# Altium PCB USBasp_下载线_标注.PCBDOC
Units mm, origin at the board's own origin, x right, y up, seen from the top; angles counter-clockwise.
Board outline 152.4 x 101.6 mm, 2 copper layers (Top Layer, Bottom Layer); 21 components, 22 nets, 84 pads, 0 vias.
Unrouted connection lines stored in the file: 49.
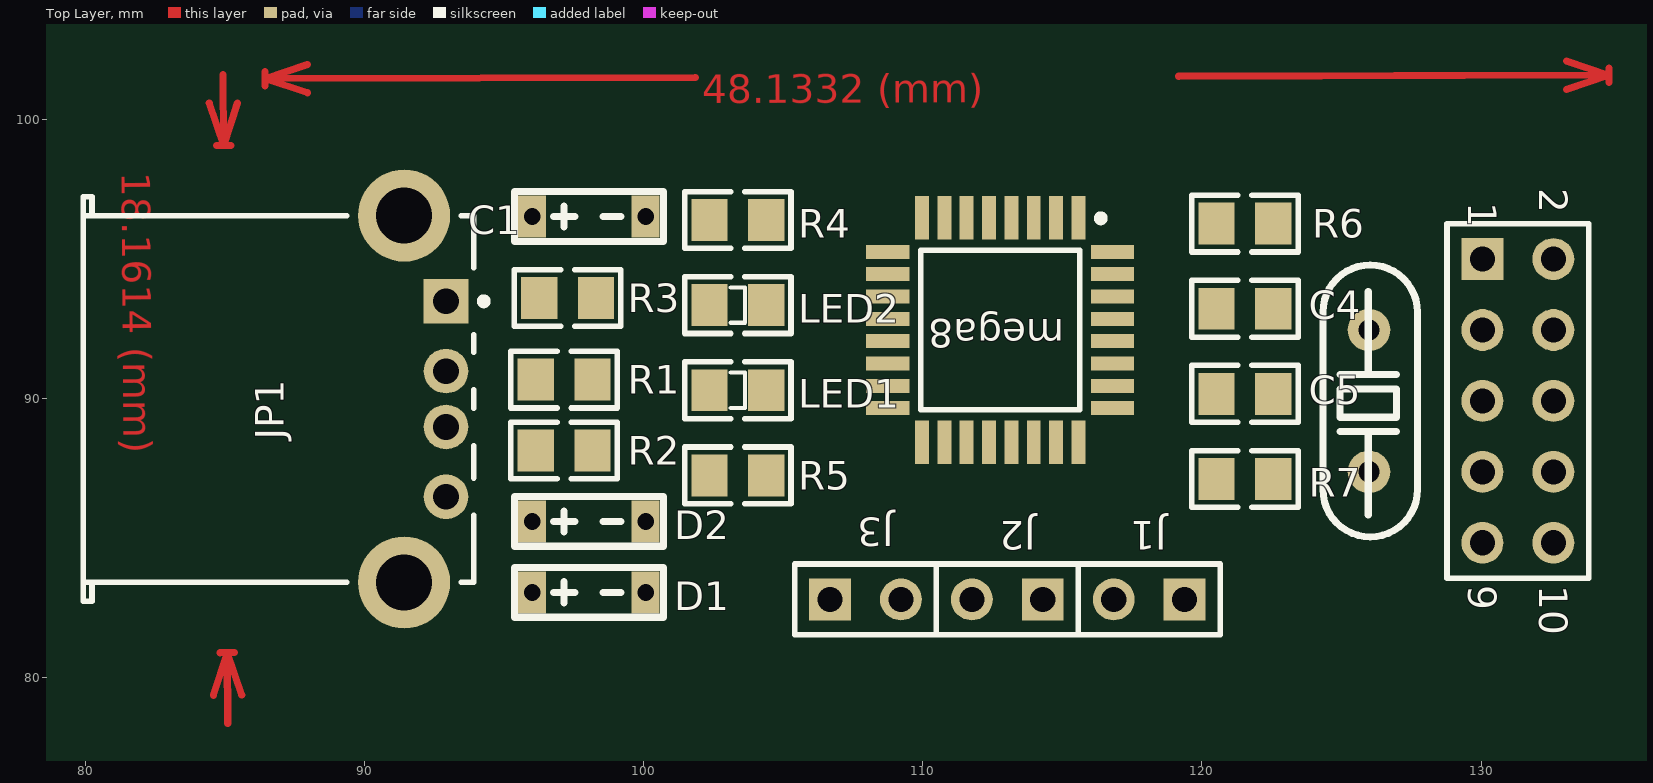
[diagram p0: Top Layer view]
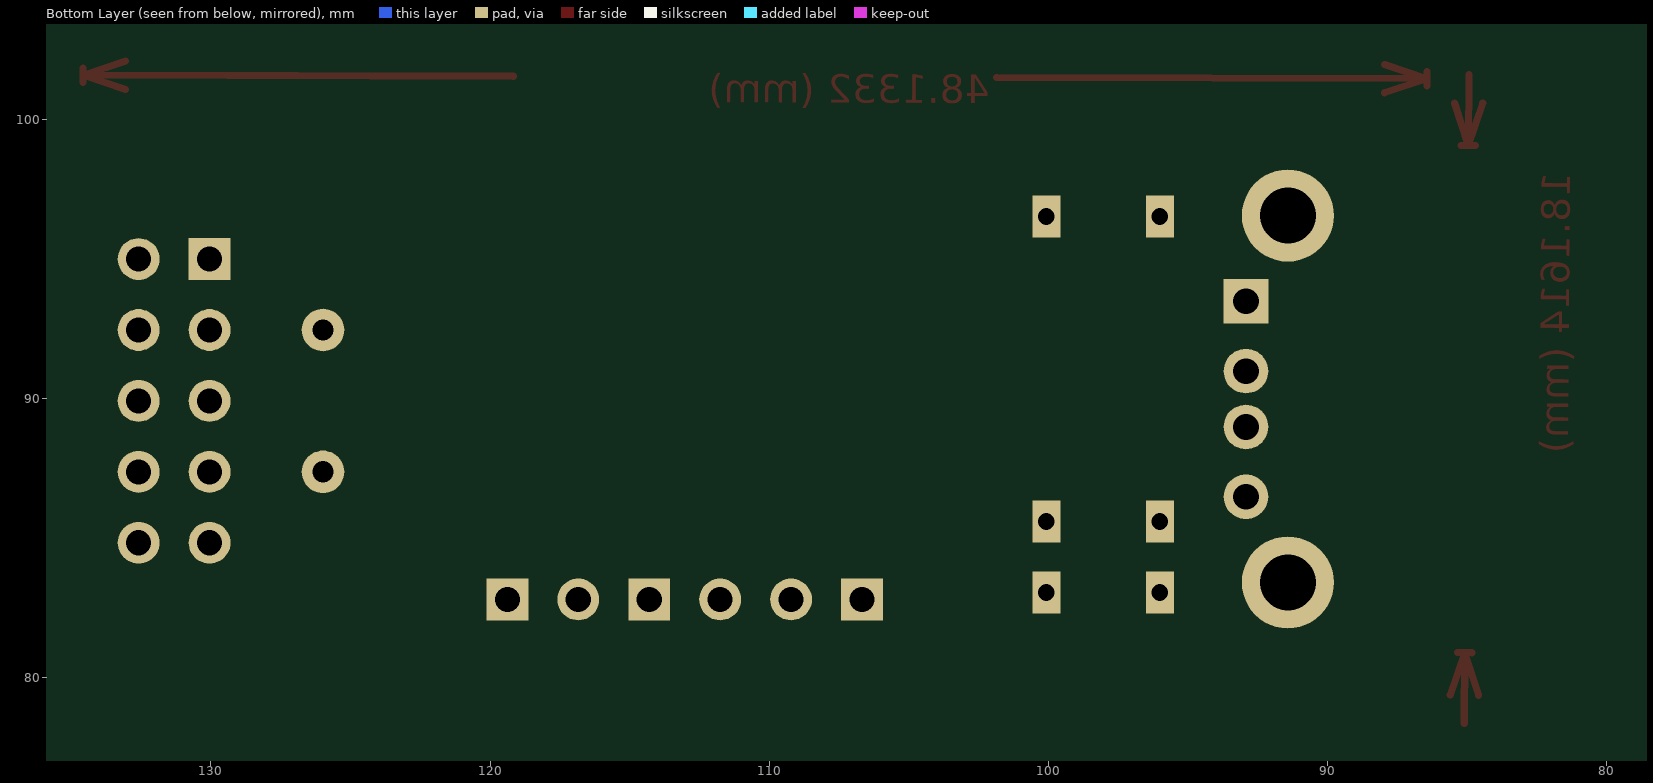
[diagram p1: Bottom Layer view, seen from below]

## Layer stack, top to bottom
Top Layer: signal copper 0.0356
Dielectric: dielectric 0.32, FR-4, Dk 4.8
Bottom Layer: signal copper 0.0356

## Board outline
25.4,25.4 177.8,25.4 177.8,127 25.4,127

## Design rules (kind name [scope] priority, off if disabled: settings)
Clearance [All] p1: gap=0.254
ComponentClearance [All] p1: gap=0.254 collisioncheckmode=3 verticalgap=0.254
PolygonConnect [All] p1: connectstyle=Relief reliefconductorwidth=0.254 reliefentries=4 polygonreliefangle="90 Angle"
RoutingVias [All] p1: holewidth=0.711 width=1.27 viastyle="Through Hole" minholewidth=0.711 minwidth=1.27 maxholewidth=0.711 maxwidth=1.27
SolderMaskExpansion [All] p1: expansion=0.102
TestPointUsage [All] p1: valid=0 allowmultiple=FALSE
Testpoint [All] p1: side=15 testpointundercomponent=TRUE minsize=1.016 maxsize=2.54 preferedsize=1.524 minholesize=0 maxholesize=1.016 preferedholesize=0.813 testpointgrid=0.025 style=1023 order=0123456789
Width [All] p1: maxlimit=0.254 minlimit=0.254 preferedwidth=0.254
17 further rules are at their usual default settings.

## Components (designator, comment, footprint, x,y, rotation, side; value= is the part's Value field where it differs from the comment)
C1 "" TPDR 100.584,96.52 r0 top
C4 "" TP-0805-R 124.079,91.948 r0 top
C5 "" TP-0805-R 124.079,88.9 r0 top
D1 "Diode 11DQ03" TPDR 100.584,83.058 r0 top
D2 "Diode 11DQ03" TPDR 100.584,85.598 r0 top
ISP "" HDR2X5 130.048,94.996 r270 top
J1 "CON2" HDR1X2 119.38,82.804 r180 top
J2 "CON2" HDR1X2 114.3,82.804 r180 top
J3 "CON2" HDR1X2 106.68,82.804 r0 top
JP1 "4 HEADER" USB-5V 90.424,86.36 r180 top
LED1 "" TP-0805-D 105.918,89.027 r0 top
LED2 "" TP-0805-D 105.918,92.075 r0 top
mega8 "贴片" QFP7x7-G32/N 112.776,92.456 r270 top
R1 "" TP-0805-R 99.695,89.408 r0 top
R2 "" TP-0805-R 94.615,89.408 r180 top
R3 "" TP-0805-R 94.742,94.869 r180 top
R4 "" TP-0805-R 105.918,95.123 r0 top
R5 "" TP-0805-R 105.918,85.979 r0 top
R6 "" TP-0805-R 118.999,97.536 r180 top
R7 "" TP-0805-R 118.999,88.392 r180 top
Y1 "XTAL" JZ_ZC 125.984,92.456 r90 top

## Footprints (in the part's own frame and the unit in brackets; to place one, negate y for a bottom-side part, rotate by r counter-clockwise, add the part's x,y. Pads: shape width x height; smd on the part's side, far side on the other; paste and mask are expansions set on the pad)
HDR1X2 [mm] "Connector; Header; 2 Position"
  rect 1.5x1.5 hole 0.9: 1(0,0)
  round 1.5 hole 0.9: 2(2.54,0)
  silkscreen extent -1.27,-1.27 3.81,1.27
HDR2X5 [mm] "Connector; Header; 5x2 Position"
  rect 1.5x1.5 hole 0.9: 1(0,0)
  round 1.5 hole 0.9: 2(0,2.54) 3(2.54,0) 4(2.54,2.54) 5(5.08,0) 6(5.08,2.54) 7(7.62,0) 8(7.62,2.54) 9(10.16,0) 10(10.16,2.54)
  silkscreen extent -1.27,-1.27 11.43,3.81
JZ_ZC [mil] "晶振"
  round 60 hole 30: 1(-200,0) 2(0,0)
  silkscreen extent -292,-68 92,65
QFP7x7-G32/N [mm] "贴片mega8"
  rect 1.55x0.5 smd: 1(-4.025,2.8) 2(-4.025,2) 3(-4.025,1.2) 4(-4.025,0.4) 5(-4.025,-0.4) 6(-4.025,-1.2) 7(-4.025,-2) 8(-4.025,-2.8) 17(4.025,-2.8) 18(4.025,-2) 19(4.025,-1.2) 20(4.025,-0.4) 21(4.025,0.4) 22(4.025,1.2) 23(4.025,2) 24(4.025,2.8)
  rect 0.5x1.55 smd: 9(-2.8,-4.025) 10(-2,-4.025) 11(-1.2,-4.025) 12(-0.4,-4.025) 13(0.4,-4.025) 14(1.2,-4.025) 15(2,-4.025) 16(2.8,-4.025) 25(2.8,4.025) 26(2,4.025) 27(1.2,4.025) 28(0.4,4.025) 29(-0.4,4.025) 30(-1.2,4.025) 31(-2,4.025) 32(-2.8,4.025)
  silkscreen extent -4.12,-2.85 2.85,3.73
TP-0805-D [mm] "贴片二极管"
  rect 1.3x1.5 smd: 1(-3.556,1.27) 2(-1.524,1.27)
  silkscreen extent -4.44,0.25 -0.64,2.29
TP-0805-R [mm] "贴片0805"
  rect 1.3x1.5 smd: 1(-3.556,1.27) 2(-1.524,1.27)
  silkscreen extent -4.44,0.25 -0.64,2.29
TPDR [mm] "贴片电容"
  rect 1x1.5 hole 0.6: 1(-4.572,0) 2(-0.508,0)
  silkscreen extent -5.21,-0.89 0.13,0.89
USB-5V [mm] "USB接口"
  rect 1.6x1.6 hole 0.92: 1(-2.503,-7.123)
  round 1.6 hole 0.92: 2(-2.503,-4.624) 3(-2.503,-2.624) 4(-2.503,-0.124)
  round 3.3 hole 2: 5(-1.002,2.947) 6(-1.002,-10.193)
  silkscreen extent -3.98,-10.87 10.5,3.63

## Part data
C1: library part "Cap Pol2", "Polarized Capacitor (Axial)"
C4 C5: library part CAPSMD, "Capacitor SMD1206"
D1 D2: "Schottky Rectifier"
ISP: library part MLW10A, "Header, 5-Pin, Dual row, Right Angle"
J1 J2 J3: "Connector"
JP1: "4 Pin Header"
LED1: library part "LED Piros", "Piros Led 3mm"
LED2: library part "LED Zöld", "Zöld Led 3mm"
mega8: library part ATmega8-A, "8 位微处理器/32引脚"
R1 R2 R3 R4 R5 R6 R7: library part RES, "Resistor SMD1206, 1% fémréteg"
Y1: "Crystal Oscillator"

## Nets (pads, with @x,y where several pads share a name; then routed paths per layer and width w, separated by ;. In a path a pad name is that pad's centre, name@x,y a point inside that pad or via, vN(x,y) a via of type N, cw(c..) or ccw(c..) an arc to the next point about the centre after c; other vN are vias at no path point)
GND: C1.2 C4.1 C5.1 D1.1 D2.1 ISP.8 ISP.10 J1.2 JP1.4 mega8.3 mega8.5 mega8.21
MISO: ISP.9 mega8.16
MOSI: ISP.1 mega8.15
NetD1_2: D1.2 JP1.3 R2.2
NetD2_2: D2.2 JP1.2 R1.1 R3.1
NetISP_2: ISP.2 J2.1
NetISP_4: ISP.4 R7.1
NetJ1_1: J1.1 mega8.25
NetJ3_2: J3.2 mega8.29 R6.1
NetLED1_1: LED1.1 R5.1
NetLED1_2: LED1.2 mega8.24
NetLED2_1: LED2.1 R4.1
NetLED2_2: LED2.2 mega8.23
Netmega8_12: mega8.12 R1.2
PB1: mega8.13 mega8.32 R2.1
PB6: C4.2 mega8.7 Y1.1
PB7: C5.2 mega8.8 Y1.2
PD0: ISP.6 mega8.30
PD1: mega8.31 R7.2
RESET: ISP.5 J3.1 mega8.14
SCK: ISP.7 mega8.17
VCC: C1.1 J2.2 JP1.1 mega8.4 mega8.6 mega8.18 mega8.20 R3.2 R4.2 R5.2 R6.2
pads on no net: ISP.3 JP1.5 JP1.6 mega8.1 mega8.2 mega8.9 mega8.10 mega8.11 mega8.19 mega8.22 mega8.26 mega8.27 mega8.28
copper on no net: | length 50.8
  Top Layer w0.254: 84.444,100.58 84.963,99.06 ; 84.593,79.371 85.09,80.899 ; 84.709,99.058 85.217,99.062 ; 84.836,80.897 85.344,80.901 ; 84.945,101.6 84.963,99.06 ; 85.108,78.359 85.09,80.899 ; 85.46,100.588 84.963,99.06 ; 85.609,79.379 85.09,80.899 ; 86.443,101.711 86.444,101.203 ; 87.966,101.969 86.444,101.457 ; 87.969,100.953 86.444,101.457 ; 101.852,101.497 86.444,101.457 ; 119.169,101.543 134.577,101.584 ; 133.051,102.088 134.577,101.584 ; 133.054,101.072 134.577,101.584 ; 134.576,101.838 134.577,101.33

## Other copper
Top Layer:
  text "48.1332 (mm)" at 102.108,100.584 h1.02 r0.15
  text "18.1614 (mm)" at 81.313,98.105 h1.02 r270.4

## Silkscreen, mask and mechanical layers (free items; w line width, h text height)
Mechanical 1:
  lines w0.254: 84.455,82.169 85.725,80.899 134.366,80.899 134.493,81.026 134.493,98.806 134.366,98.933 85.725,98.933 84.582,97.79 84.455,97.79 84.455,82.169

## Text inside footprints (layer, text, board x,y; h text height)
ISP: Top Overlay "2" at 132.08,97.536 h1.02 r270; Top Overlay "1" at 129.54,97.028 h1.02 r270; Top Overlay "9" at 129.54,83.312 h1.02 r270; Top Overlay "10" at 132.08,83.312 h1.02 r270